# EAGLE board QFP65-bo (EAGLE 5.11)
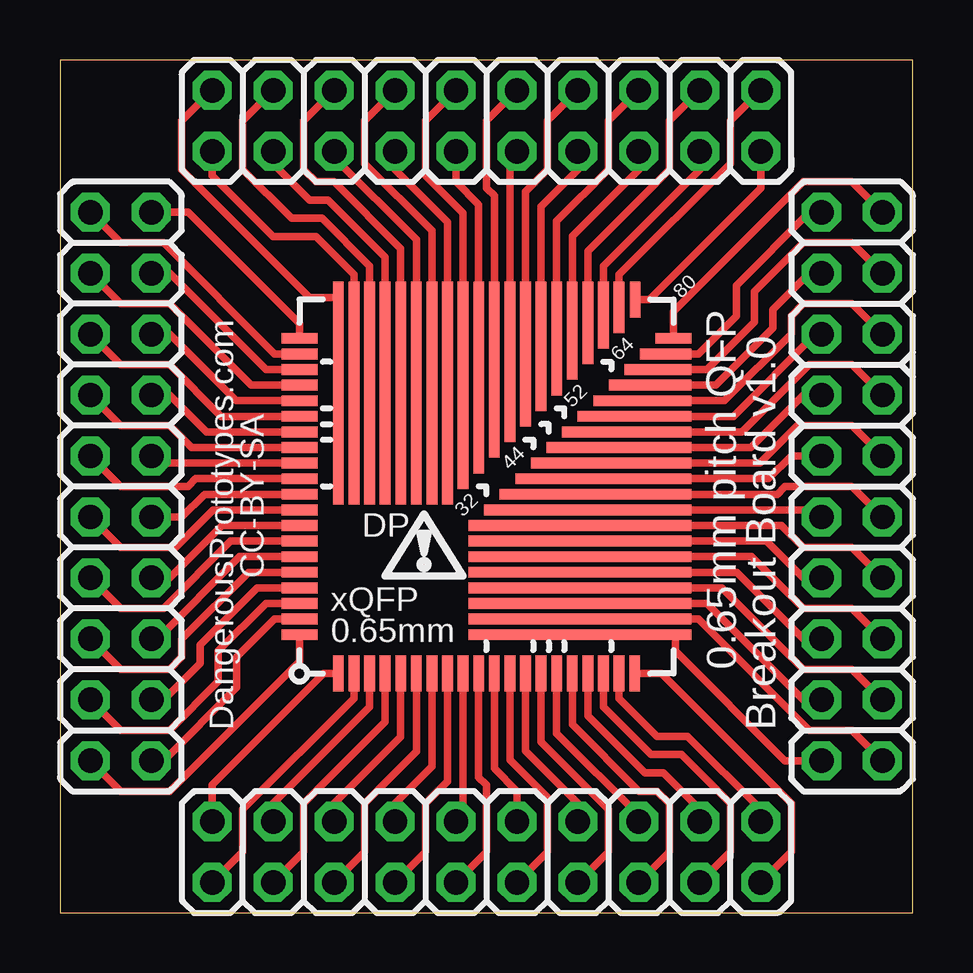
[diagram p0: board, top side]
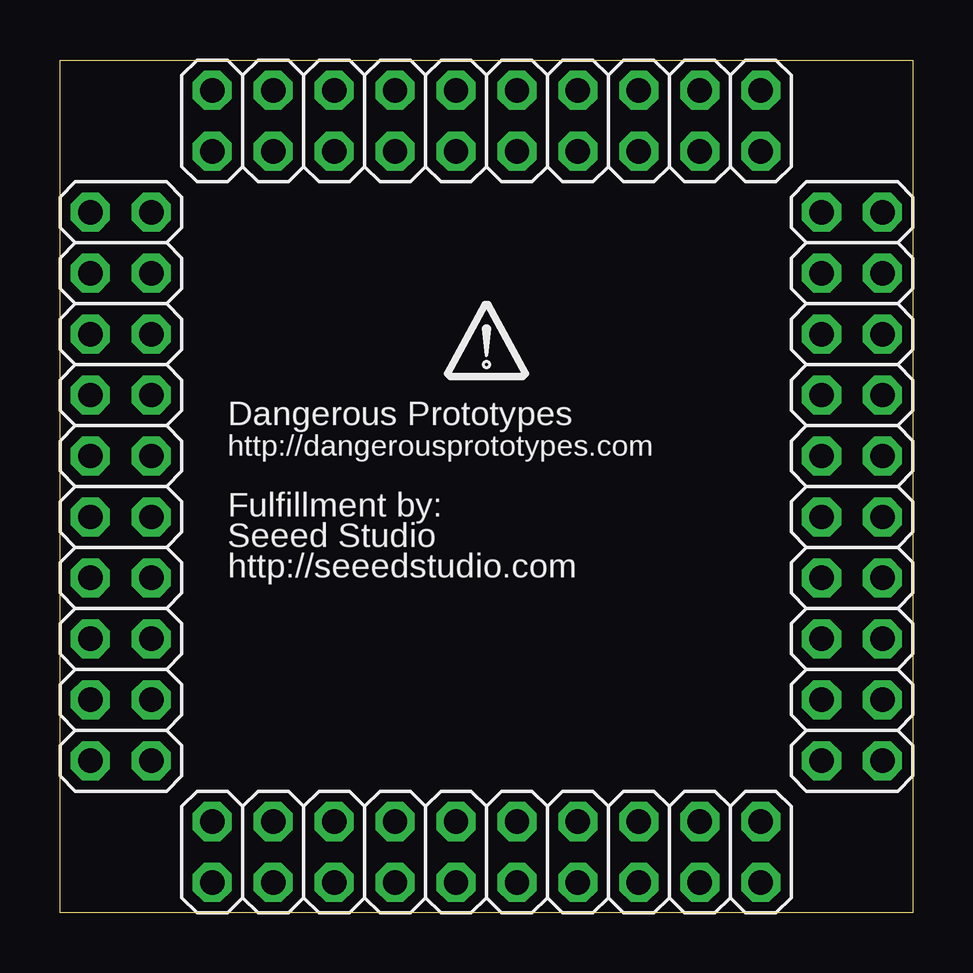
[diagram p1: board, bottom side, seen from below]

Size 35.56 x 35.56 mm. Coordinates in mm from the lower left corner, seen from the top.
Outline: 0,0 35.56,0 35.56,35.56 0,35.56 0,0
Copper layers (1*16): Top 0.035mm / dielectric 1.5mm / Bottom 0.035mm
Design rules "SparkFun *": minimum track width 8mil, minimum drill 20mil, track to track 8mil, track to pad 6mil, pad to pad 6mil, via to via 8mil, smd to smd 6mil, copper to edge 10mil, drill to drill 8mil, minimum pad ring 12mil, minimum via ring 10mil, stop-mask expansion 4mil, vias tented up to drill 25mil, thermal gap 10mil

## Footprints (pad centres in the part's own frame; a part is rotated, then mirrored left to right if it is on the bottom)
2X10 = drill 1.016 octagon: 1 -11.43,-1.27; 2 -11.43,1.27; 3 -8.89,-1.27; 4 -8.89,1.27; 5 -6.35,-1.27; 6 -6.35,1.27; 7 -3.81,-1.27; 8 -3.81,1.27; 9 -1.27,-1.27; 10 -1.27,1.27; 11 1.27,-1.27; 12 1.27,1.27; 13 3.81,-1.27; 14 3.81,1.27; 15 6.35,-1.27; 16 6.35,1.27; 17 8.89,-1.27; 18 8.89,1.27; 19 11.43,-1.27; 20 11.43,1.27
BB_QFP_065 = smd 0.45 x 1.5: 1 -6.175,-7.8; 2 -5.525,-7.8; 3 -4.875,-7.8; 4 -4.225,-7.8; 5 -3.575,-7.8; 6 -2.925,-7.8; 7 -2.275,-7.8; 8 -1.625,-7.8; 9 -0.975,-7.8; 10 -0.325,-7.8; 11 0.325,-7.8; 12 0.975,-7.8; 13 1.625,-7.8; 14 2.275,-7.8; 15 2.925,-7.8; 16 3.575,-7.8; 17 4.225,-7.8; 18 4.875,-7.8; 19 5.525,-7.8; 20 6.175,-7.8; 41 6.2,7.8 | smd 9.3 x 0.45: 21 3.9,-6.175; 22 3.9,-5.525; 23 3.9,-4.875; 24 3.9,-4.225; 25 3.9,-3.575; 26 3.9,-2.925; 27 3.9,-2.275; 28 3.9,-1.625 | smd 8.65 x 0.45: 29 4.225,-0.975 | smd 8 x 0.45: 30 4.55,-0.325 | smd 7.35 x 0.45: 31 4.875,0.325 | smd 6.7 x 0.45: 32 5.2,0.975 | smd 6.05 x 0.45: 33 5.525,1.625 | smd 5.4 x 0.45: 34 5.85,2.275 | smd 4.75 x 0.45: 35 6.175,2.925 | smd 4.1 x 0.45: 36 6.5,3.575 | smd 3.45 x 0.45: 37 6.825,4.225 | smd 2.8 x 0.45: 38 7.15,4.875 | smd 2.15 x 0.45: 39 7.475,5.525 | smd 1.5 x 0.45: 40 7.8,6.175; 61 -7.8,6.175; 62 -7.8,5.525; 63 -7.8,4.875; 64 -7.8,4.225; 65 -7.8,3.575; 66 -7.8,2.925; 67 -7.8,2.275; 68 -7.8,1.625; 69 -7.8,0.975; 70 -7.8,0.325; 71 -7.8,-0.325; 72 -7.8,-0.975; 73 -7.8,-1.625; 74 -7.8,-2.275; 75 -7.8,-2.925; 76 -7.8,-3.575; 77 -7.8,-4.225; 78 -7.8,-4.875; 79 -7.8,-5.525; 80 -7.8,-6.175 | smd 0.45 x 2.15: 42 5.525,7.475 | smd 0.45 x 2.8: 43 4.875,7.15 | smd 0.45 x 3.45: 44 4.225,6.825 | smd 0.45 x 4.1: 45 3.575,6.5 | smd 0.45 x 4.75: 46 2.925,6.175 | smd 0.45 x 5.4: 47 2.275,5.85 | smd 0.45 x 6.05: 48 1.625,5.525 | smd 0.45 x 6.7: 49 0.975,5.2 | smd 0.45 x 7.35: 50 0.325,4.875 | smd 0.45 x 8: 51 -0.325,4.55 | smd 0.45 x 8.65: 52 -0.975,4.225 | smd 0.45 x 9.3: 53 -1.625,3.9; 54 -2.275,3.9; 55 -2.925,3.9; 56 -3.575,3.9; 57 -4.225,3.9; 58 -4.875,3.9; 59 -5.525,3.9; 60 -6.175,3.9

## Placement (x,y rotation side)
JP1  [2X10]  17.78,2.54 180 bottom
JP2  [2X10]  33.02,17.78 90 bottom
JP3  [2X10]  17.78,33.02 0 bottom
JP4  [2X10]  2.54,17.78 270 bottom
U$1  BB_XQFP_065  [BB_QFP_065]  17.78,17.78 0 top
U$2  [DP_LOGO]  17.78,22.86 0 bottom

## Library data of the parts
JP1-JP4 = pinhead
U$1 = DP_protoboard
U$2 = dp_devices

## Nets
N$1: JP1.1 U$1.1
N$2: JP1.2 U$1.2
N$3: JP1.3 U$1.3
N$4: JP1.4 U$1.4
N$5: JP1.5 U$1.5
N$6: JP1.6 U$1.6
N$7: JP1.7 U$1.7
N$8: JP1.8 U$1.8
N$9: JP1.9 U$1.9
N$10: JP1.10 U$1.10
N$11: JP1.11 U$1.11
N$12: JP1.12 U$1.12
N$13: JP1.13 U$1.13
N$14: JP1.14 U$1.14
N$15: JP1.15 U$1.15
N$16: JP1.16 U$1.16
N$17: JP1.17 U$1.17
N$18: JP1.18 U$1.18
N$19: JP1.19 U$1.19
N$20: JP1.20 U$1.20
N$21: JP2.1 U$1.21
N$22: JP2.2 U$1.22
N$23: JP2.3 U$1.23
N$24: JP2.4 U$1.24
N$25: JP2.5 U$1.25
N$26: JP2.6 U$1.26
N$27: JP2.7 U$1.27
N$28: JP2.8 U$1.28
N$29: JP2.9 U$1.29
N$30: JP2.10 U$1.30
N$31: JP2.11 U$1.31
N$32: JP2.12 U$1.32
N$33: JP2.13 U$1.33
N$34: JP2.14 U$1.34
N$35: JP2.15 U$1.35
N$36: JP2.16 U$1.36
N$37: JP2.17 U$1.37
N$38: JP2.18 U$1.38
N$39: JP2.19 U$1.39
N$40: JP2.20 U$1.40
N$41: JP3.1 U$1.41
N$42: JP3.2 U$1.42
N$43: JP3.3 U$1.43
N$44: JP3.4 U$1.44
N$45: JP3.5 U$1.45
N$46: JP3.6 U$1.46
N$47: JP3.7 U$1.47
N$48: JP3.8 U$1.48
N$49: JP3.9 U$1.49
N$50: JP3.10 U$1.50
N$51: JP3.11 U$1.51
N$52: JP3.12 U$1.52
N$53: JP3.13 U$1.53
N$54: JP3.14 U$1.54
N$55: JP3.15 U$1.55
N$56: JP3.16 U$1.56
N$57: JP3.17 U$1.57
N$58: JP3.18 U$1.58
N$59: JP3.19 U$1.59
N$60: JP3.20 U$1.60
N$61: JP4.1 U$1.61
N$62: JP4.2 U$1.62
N$63: JP4.3 U$1.63
N$64: JP4.4 U$1.64
N$65: JP4.5 U$1.65
N$66: JP4.6 U$1.66
N$67: JP4.7 U$1.67
N$68: JP4.8 U$1.68
N$69: JP4.9 U$1.69
N$70: JP4.10 U$1.70
N$71: JP4.11 U$1.71
N$72: JP4.12 U$1.72
N$73: JP4.13 U$1.73
N$74: JP4.14 U$1.74
N$75: JP4.15 U$1.75
N$76: JP4.16 U$1.76
N$77: JP4.17 U$1.77
N$78: JP4.18 U$1.78
N$79: JP4.19 U$1.79
N$80: JP4.20 U$1.80

## Tracks (layer width: path | path; a pad name or v marks a point on that pad's centre or on a via)
N$1
  Top 0.305: U$1.1 11,9.98 6.35,5.33 JP1.1
N$2
  Top 0.305: U$1.2 12.26,8.95 7.62,4.32 7.62,2.54 JP1.2
N$3
  Top 0.305: U$1.3 12.9,8.59 8.89,4.57 JP1.3
N$4
  Top 0.305: U$1.4 13.55,7.97 10.16,4.57 10.16,2.54 JP1.4
N$5
  Top 0.305: U$1.5 14.21,7.35 11.43,4.57 JP1.5
N$6
  Top 0.305: U$1.6 14.86,6.73 12.7,4.57 12.7,2.54 JP1.6
N$7
  Top 0.305: U$1.7 15.51,6.11 13.97,4.57 JP1.7
N$8
  Top 0.305: U$1.8 16.16,5.49 15.24,4.57 15.24,2.54 JP1.8
N$9
  Top 0.305: U$1.9 16.8,4.11 JP1.9
N$10
  Top 0.305: U$1.10 17.45,5.66 17.78,5.33 17.78,2.54 JP1.10
N$11
  Top 0.305: U$1.11 18.11,6.03 19.05,5.08 JP1.11
N$12
  Top 0.305: U$1.12 18.75,6.39 20.32,4.83 20.32,2.54 JP1.12
N$13
  Top 0.305: U$1.13 19.41,6.76 21.59,4.57 JP1.13
N$14
  Top 0.305: U$1.14 20.05,7.12 22.86,4.32 22.86,2.54 JP1.14
N$15
  Top 0.305: U$1.15 20.7,7.49 24.13,4.06 JP1.15
N$16
  Top 0.305: JP1.16 25.4,2.54 25.4,4.57 24.89,5.08 24.13,5.08 21.36,7.86 U$1.16
N$17
  Top 0.305: U$1.17 22,8.22 24.38,5.84 25.15,5.84 26.67,4.32 JP1.17
N$18
  Top 0.305: U$1.18 22.66,8.59 24.64,6.6 25.91,6.6 27.94,4.57 27.94,2.54 JP1.18
N$19
  Top 0.305: U$1.19 23.3,8.95 24.89,7.37 26.16,7.37 29.21,4.32 JP1.19
N$20
  Top 0.305: U$1.20 25.07,9.98 30.48,4.57 30.48,2.54 JP1.20
N$21
  Top 0.305: U$1.21 25.57,11.61 25.65,11.43 25.65,10.92 30.23,6.35 JP2.1
N$22
  Top 0.305: U$1.22 26.61,12.26 31.24,7.62 33.02,7.62 JP2.2
N$23
  Top 0.305: U$1.23 26.97,12.9 30.99,8.89 JP2.3
N$24
  Top 0.305: U$1.24 27.59,13.55 30.99,10.16 33.02,10.16 JP2.4
N$25
  Top 0.305: U$1.25 28.21,14.21 30.99,11.43 JP2.5
N$26
  Top 0.305: U$1.26 28.83,14.86 30.99,12.7 33.02,12.7 JP2.6
N$27
  Top 0.305: U$1.27 29.45,15.51 30.99,13.97 JP2.7
N$28
  Top 0.305: U$1.28 30.07,16.16 30.99,15.24 33.02,15.24 JP2.8
N$29
  Top 0.305: U$1.29 31.45,16.8 JP2.9
N$30
  Top 0.305: U$1.30 29.9,17.45 30.23,17.78 33.02,17.78 JP2.10
N$31
  Top 0.305: U$1.31 29.54,18.11 30.48,19.05 JP2.11
N$32
  Top 0.305: U$1.32 29.17,18.75 30.73,20.32 33.02,20.32 JP2.12
N$33
  Top 0.305: U$1.33 28.8,19.41 30.99,21.59 JP2.13
N$34
  Top 0.305: U$1.34 28.44,20.05 31.24,22.86 33.02,22.86 JP2.14
N$35
  Top 0.305: U$1.35 28.07,20.7 31.5,24.13 JP2.15
N$36
  Top 0.305: JP2.16 33.02,25.4 30.99,25.4 30.48,24.89 30.48,24.13 27.7,21.36 U$1.36
N$37
  Top 0.305: U$1.37 27.34,22 29.72,24.38 29.72,25.15 31.24,26.67 JP2.17
N$38
  Top 0.305: U$1.38 26.97,22.66 28.96,24.64 28.96,25.91 30.99,27.94 33.02,27.94 JP2.18
N$39
  Top 0.305: U$1.39 26.61,23.3 28.19,24.89 28.19,26.16 31.24,29.21 JP2.19
N$40
  Top 0.305: U$1.40 25.58,25.07 30.99,30.48 33.02,30.48 JP2.20
N$41
  Top 0.305: U$1.41 24.56,25.58 29.21,30.23 JP3.1
N$42
  Top 0.305: U$1.42 23.3,26.61 27.94,31.24 27.94,33.02 JP3.2
N$43
  Top 0.305: U$1.43 22.66,26.97 26.67,30.99 JP3.3
N$44
  Top 0.305: U$1.44 22,27.59 25.4,30.99 25.4,33.02 JP3.4
N$45
  Top 0.305: U$1.45 21.36,28.21 24.13,30.99 JP3.5
N$46
  Top 0.305: U$1.46 20.7,28.83 22.86,30.99 22.86,33.02 JP3.6
N$47
  Top 0.305: U$1.47 20.05,29.45 21.59,30.99 JP3.7
N$48
  Top 0.305: U$1.48 19.41,30.07 20.32,30.99 20.32,33.02 JP3.8
N$49
  Top 0.305: U$1.49 18.75,31.45 JP3.9
N$50
  Top 0.305: U$1.50 18.11,29.9 17.78,30.23 17.78,33.02 JP3.10
N$51
  Top 0.305: U$1.51 17.45,29.54 16.51,30.48 JP3.11
N$52
  Top 0.305: U$1.52 16.8,29.17 15.24,30.73 15.24,33.02 JP3.12
N$53
  Top 0.305: U$1.53 16.16,28.8 13.97,30.99 JP3.13
N$54
  Top 0.305: U$1.54 15.51,28.44 12.7,31.24 12.7,33.02 JP3.14
N$55
  Top 0.305: U$1.55 14.86,28.07 11.43,31.5 JP3.15
N$56
  Top 0.305: JP3.16 10.16,33.02 10.16,30.99 10.67,30.48 11.43,30.48 14.21,27.7 U$1.56
N$57
  Top 0.305: U$1.57 13.55,27.34 11.18,29.72 10.41,29.72 8.89,31.24 JP3.17
N$58
  Top 0.305: U$1.58 12.9,26.97 10.92,28.96 9.65,28.96 7.62,30.99 7.62,33.02 JP3.18
N$59
  Top 0.305: U$1.59 12.26,26.61 10.67,28.19 8.89,28.19 6.35,30.73 JP3.19
N$60
  Top 0.305: U$1.60 11.61,25.57 11.43,25.65 10.41,25.65 5.08,30.99 5.08,33.02 JP3.20
N$61
  Top 0.305: U$1.61 9.98,24.56 5.33,29.21 JP4.1
N$62
  Top 0.305: U$1.62 8.95,23.3 4.32,27.94 2.54,27.94 JP4.2
N$63
  Top 0.305: U$1.63 8.59,22.66 4.57,26.67 JP4.3
N$64
  Top 0.305: U$1.64 7.97,22 4.57,25.4 2.54,25.4 JP4.4
N$65
  Top 0.305: U$1.65 7.35,21.36 4.57,24.13 JP4.5
N$66
  Top 0.305: U$1.66 6.73,20.7 4.57,22.86 2.54,22.86 JP4.6
N$67
  Top 0.305: U$1.67 6.11,20.05 4.57,21.59 JP4.7
N$68
  Top 0.305: U$1.68 5.49,19.41 4.57,20.32 2.54,20.32 JP4.8
N$69
  Top 0.305: U$1.69 4.11,18.75 JP4.9
N$70
  Top 0.305: U$1.70 5.66,18.11 5.33,17.78 2.54,17.78 JP4.10
N$71
  Top 0.305: U$1.71 6.03,17.45 5.08,16.51 JP4.11
N$72
  Top 0.305: U$1.72 6.39,16.8 4.83,15.24 2.54,15.24 JP4.12
N$73
  Top 0.305: U$1.73 6.76,16.16 4.57,13.97 JP4.13
N$74
  Top 0.305: U$1.74 7.12,15.51 4.32,12.7 2.54,12.7 JP4.14
N$75
  Top 0.305: U$1.75 7.49,14.86 4.06,11.43 JP4.15
N$76
  Top 0.305: JP4.16 2.54,10.16 4.57,10.16 5.08,10.67 5.08,11.43 7.86,14.21 U$1.76
N$77
  Top 0.305: U$1.77 8.22,13.55 5.84,11.18 5.84,10.41 4.32,8.89 JP4.17
N$78
  Top 0.305: U$1.78 8.59,12.9 6.6,10.92 6.6,9.65 4.57,7.62 2.54,7.62 JP4.18
N$79
  Top 0.305: U$1.79 8.95,12.26 7.37,10.67 7.37,9.4 4.32,6.35 JP4.19
N$80
  Top 0.305: U$1.80 9.98,10.49 4.57,5.08 2.54,5.08 JP4.20

## Text on the board
tNames: CC-BY-SA | 0.65mm pitch QFP | DangerousPrototypes.com | Breakout Board v1.0
bNames: Dangerous Prototypes | http://dangerousprototypes.com | Fulfillment by: | Seeed Studio | http://seeedstudio.com